# EAGLE board octanis_v0.4 (EAGLE 7.2.0)
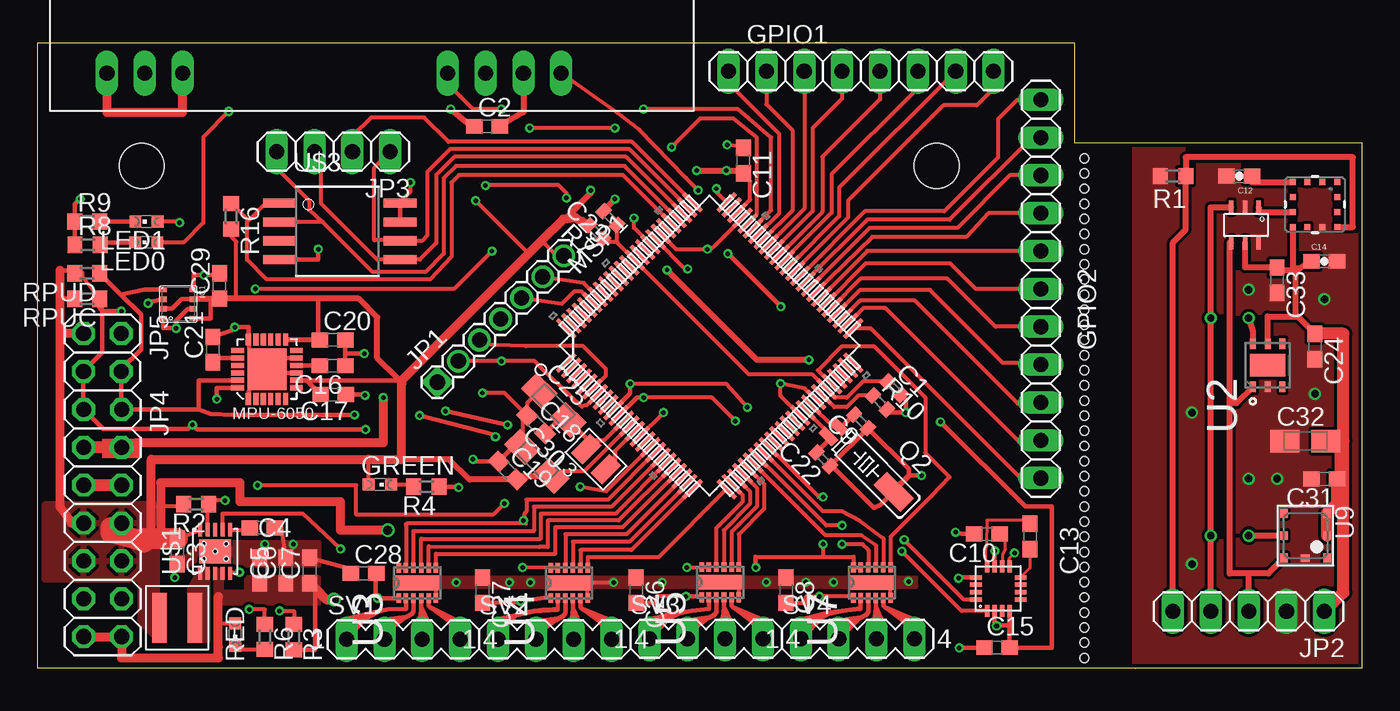
[diagram p0: board, top side]
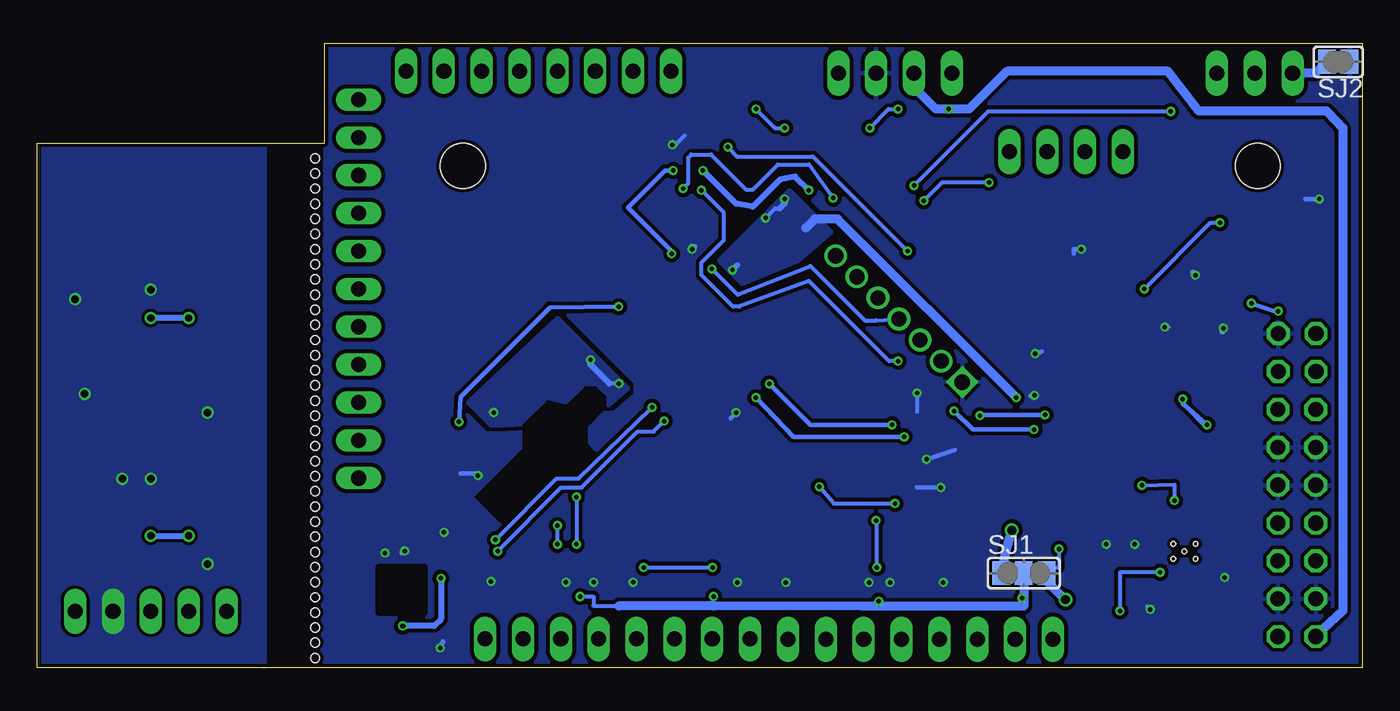
[diagram p1: board, bottom side, seen from below]

Size 88.9 x 41.94 mm. Coordinates in mm from the lower left corner, seen from the top.
Outline: 88.9,35.23 88.9,35.23
Outline: 88.9,35.23 73.67,35.23
Outline: 73.67,0 73.71,0
Outline: 73.71,35.23 69.62,35.23 69.62,41.94 0,41.94 0,0.03 88.9,0.03 88.9,35.23
Outline: 88.9,35.23 88.7,35.23
Copper layers (1*16): Top 0.035mm / dielectric 1.5mm / Bottom 0.035mm
Design rules "SeeedStudio_2layer_DRU_no_angle_20140221 *": minimum track width 8mil, minimum drill 12mil, track to track 8mil, track to pad 8mil, pad to pad 6mil, via to via 8mil, smd to smd 0mil, copper to edge 10mil, drill to drill 10mil, minimum pad ring 10mil, minimum via ring 6mil, stop-mask expansion 2mil, vias tented up to drill 100mil, thermal gap 10mil
Net classes: 0 default: width 0.305 mm; 1 power: width 0.203 mm, drill 0.305 mm, clearance 0.152 mm; 2 VIN: width 0.203 mm, drill 0.305 mm, clearance 0.152 mm; 3 fine: width 0.406 mm, drill 0.61 mm, clearance 0.152 mm
Holes 3 mm at 7.01,33.71 60.35,33.71
Holes 0.6 mm at 70.26,34.21 70.26,33.2 70.26,32.18 70.26,31.17 70.26,30.15 70.26,29.13 70.26,28.12 70.26,27.1 70.26,26.09 70.26,25.07 70.26,24.05 70.26,23.04 70.26,22.02 70.26,21.01 70.26,19.99 70.26,18.97 70.26,17.96 70.26,16.94 70.26,15.93 70.26,14.91 70.26,13.89 70.26,12.88 70.26,11.86 70.26,10.85 70.26,9.83 70.26,8.81 70.26,7.8 70.26,6.78 70.26,5.77 70.26,4.75 70.26,3.73 70.26,2.72 70.26,1.7 70.26,0.69
bRestrict: area 63,3.8 to 66,6.8

## Footprints (pad centres in the part's own frame; a part is rotated, then mirrored left to right if it is on the bottom)
C0402 = smd 0.7 x 0.9: 1 -0.65,0; 2 0.65,0
C0603 = smd 1.1 x 1: 1 -0.85,0; 2 0.85,0
0603-CAP = smd 1.1 x 1: 1 -0.85,0; 2 0.85,0
A/3216-18R = smd 1.95 x 1.5: + 1.375,0; - -1.375,0
LPCC16 = smd 0.8 x 0.3: 1 -1.5,0.75; 2 -1.5,0.25; 3 -1.5,-0.25; 4 -1.5,-0.75; 9 1.5,-0.75; 10 1.5,-0.25; 11 1.5,0.25; 12 1.5,0.75 | smd 0.3 x 0.8: 5 -0.75,-1.5; 6 -0.25,-1.5; 7 0.25,-1.5; 8 0.75,-1.5; 13 0.75,1.5; 14 0.25,1.5; 15 -0.25,1.5; 16 -0.75,1.5
1X08 = drill 1.016 long: 1 -8.89,0; 2 -6.35,0; 3 -3.81,0; 4 -1.27,0; 5 1.27,0; 6 3.81,0; 7 6.35,0; 8 8.89,0
1X11 = drill 1.016 long: 1 -12.7,0; 2 -10.16,0; 3 -7.62,0; 4 -5.08,0; 5 -2.54,0; 6 0,0; 7 2.54,0; 8 5.08,0; 9 7.62,0; 10 10.16,0; 11 12.7,0
CHIPLED_0603 = smd 0.8 x 0.8: A 0,-0.75; C 0,0.75
BME280 = smd 0.35 x 0.5: 1 0.975,-1.025; 2 0.325,-1.025; 3 -0.325,-1.025; 4 -0.975,-1.025; 5 -0.975,1.025; 6 -0.325,1.025; 7 0.325,1.025; 8 0.975,1.025
1:07X2MM = drill 1.016 pad 1.3 square: 1 0,0 | drill 1.016 pad 1.3: 2 4,0; 3 2,0; 4 6,0; 5 8,0; 6 10,0; 7 12,0
1X05 = drill 1.016 long: 1 -5.08,0; 2 -2.54,0; 3 0,0; 4 2.54,0; 5 5.08,0
1X04 = drill 1.016 long: 1 -3.81,0; 2 -1.27,0; 3 1.27,0; 4 3.81,0
2X07 = drill 1.016 octagon: 1 -7.62,-1.27; 2 -7.62,1.27; 3 -5.08,-1.27; 4 -5.08,1.27; 5 -2.54,-1.27; 6 -2.54,1.27; 7 0,-1.27; 8 0,1.27; 9 2.54,-1.27; 10 2.54,1.27; 11 5.08,-1.27; 12 5.08,1.27; 13 7.62,-1.27; 14 7.62,1.27
2X02 = drill 1.016 octagon: 1 -1.27,-1.27; 2 -1.27,1.27; 3 1.27,-1.27; 4 1.27,1.27
XFL4020 = smd 0.965 x 3.353: P$1 -1.181,0; P$2 1.181,0
0806 = smd 1.1 x 1.8: 1 -0.94,0; 2 0.94,0
QFN24 = smd 0.8 x 0.35: 1 -2,1.25; 2 -2,0.75; 3 -2,0.25; 4 -2,-0.25; 5 -2,-0.75; 6 -2,-1.25; 13 2,-1.25; 14 2,-0.75; 15 2,-0.25; 16 2,0.25; 17 2,0.75; 18 2,1.25 | smd 0.35 x 0.85: 7 -1.25,-1.975; 8 -0.75,-1.975; 9 -0.25,-1.975; 10 0.25,-1.975; 11 0.75,-1.975; 12 1.25,-1.975; 19 1.25,1.975; 20 0.75,1.975; 21 0.25,1.975; 22 -0.25,1.975; 23 -0.75,1.975; 24 -1.25,1.975 | smd 2.8 x 2.6: P 0,0
PZ100 = smd 1.676 x 0.279: 1 -7.62,5.994; 2 -7.62,5.512; 3 -7.62,5.004; 4 -7.62,4.496; 5 -7.62,3.988; 6 -7.62,3.505; 7 -7.62,2.997; 8 -7.62,2.489; 9 -7.62,2.007; 10 -7.62,1.499; 11 -7.62,0.991; 12 -7.62,0.508; 13 -7.62,0; 14 -7.62,-0.508; 15 -7.62,-0.991; 16 -7.62,-1.499; 17 -7.62,-2.007; 18 -7.62,-2.489; 19 -7.62,-2.997; 20 -7.62,-3.505; 21 -7.62,-3.988; 22 -7.62,-4.496; 23 -7.62,-5.004; 24 -7.62,-5.512; 25 -7.62,-5.994; 51 7.62,-5.994; 52 7.62,-5.512; 53 7.62,-5.004; 54 7.62,-4.496; 55 7.62,-3.988; 56 7.62,-3.505; 57 7.62,-2.997; 58 7.62,-2.489; 59 7.62,-2.007; 60 7.62,-1.499; 61 7.62,-0.991; 62 7.62,-0.508; 63 7.62,0; 64 7.62,0.508; 65 7.62,0.991; 66 7.62,1.499; 67 7.62,2.007; 68 7.62,2.489; 69 7.62,2.997; 70 7.62,3.505; 71 7.62,3.988; 72 7.62,4.496; 73 7.62,5.004; 74 7.62,5.512; 75 7.62,5.994 | smd 0.279 x 1.676: 26 -5.994,-7.62; 27 -5.512,-7.62; 28 -5.004,-7.62; 29 -4.496,-7.62; 30 -3.988,-7.62; 31 -3.505,-7.62; 32 -2.997,-7.62; 33 -2.489,-7.62; 34 -2.007,-7.62; 35 -1.499,-7.62; 36 -0.991,-7.62; 37 -0.508,-7.62; 38 0,-7.62; 39 0.508,-7.62; 40 0.991,-7.62; 41 1.499,-7.62; 42 2.007,-7.62; 43 2.489,-7.62; 44 2.997,-7.62; 45 3.505,-7.62; 46 3.988,-7.62; 47 4.496,-7.62; 48 5.004,-7.62; 49 5.512,-7.62; 50 5.994,-7.62; 76 5.994,7.62; 77 5.512,7.62; 78 5.004,7.62; 79 4.496,7.62; 80 3.988,7.62; 81 3.505,7.62; 82 2.997,7.62; 83 2.489,7.62; 84 2.007,7.62; 85 1.499,7.62; 86 0.991,7.62; 87 0.508,7.62; 88 0,7.62; 89 -0.508,7.62; 90 -0.991,7.62; 91 -1.499,7.62; 92 -2.007,7.62; 93 -2.489,7.62; 94 -2.997,7.62; 95 -3.505,7.62; 96 -3.988,7.62; 97 -4.496,7.62; 98 -5.004,7.62; 99 -5.512,7.62; 100 -5.994,7.62
MS3V-T1R = smd 0.635 x 1.27: P1 -0.47,-4.43; P2 0.47,-4.43 | smd 1.27 x 2.54: P3 0,1.3
R0603 = smd 1 x 1.1: 1 -0.85,0; 2 0.85,0
R0402 = smd 0.7 x 0.9: 1 -0.65,0; 2 0.65,0
SJ_2 = smd 1.168 x 1.6: 1 -1.524,0; 2 0,0; 3 1.524,0
SJ = smd 1.168 x 1.6: 1 -0.762,0; 2 0.762,0
MA04-1 = drill 1.016 long: 1 -3.81,0; 2 -1.27,0; 3 1.27,0; 4 3.81,0
ML8511 = smd 0.4 x 0.4: 1 -1.5,-1.5; 2 -1.5,-0.5; 3 -1.5,0.5; 4 -1.5,1.5; 5 -0.5,1.5; 6 0.5,1.5; 7 1.5,1.5; 8 1.5,0.5; 9 1.5,-0.5; 10 1.5,-1.5; 11 0.5,-1.5; 12 -0.5,-1.5
DFN300X300X110-7N = smd 0.711 x 0.406: 1 -1.448,0.991; 2 -1.448,0; 3 -1.448,-0.991; 4 1.448,-0.991; 5 1.448,0; 6 1.448,0.991 | smd 1.499 x 2.388: 7 0,0
SON50P200X300X80-13N = smd 0.66 x 0.305: 1 -1.016,1.245; 2 -1.016,0.762; 3 -1.016,0.254; 4 -1.016,-0.254; 5 -1.016,-0.762; 6 -1.016,-1.245; 7 1.016,-1.245; 8 1.016,-0.762; 9 1.016,-0.254; 10 1.016,0.254; 11 1.016,0.762; 12 1.016,1.245 | smd 0.991 x 3.099: 13 0,0
BMP180 = smd 0.6 x 0.5: 1 1.5,1.45; 2 0,1.45; 3 -1.5,1.45; 4 -1.5,-1.45; 5 0,-1.45; 6 1.5,-1.45 | smd 0.5 x 0.6: 7 1.5,0
S-PVSON-N10 = smd 0.28 x 0.825: 1 -1,-1.462; 2 -0.5,-1.462; 3 0,-1.462; 4 0.5,-1.462; 5 1,-1.462; 6 1,1.462; 7 0.5,1.462; 8 0,1.462; 9 -0.5,1.462; 10 -1,1.462 | smd 2.15 x 1.6: EXPAD 0,0 | hole 0.3: -0.75,0.5; 0.75,0.5; 0.75,-0.5; -0.75,-0.5; 0,0
STAR = smd 0.152 x 0.305: AGND 0.635,-0.635; DGND 0.635,0.635 | smd 0.305 x 0.152: GND 0.635,0
SOIC_8-LEAD = smd 0.61 x 2.21: CE -1.905,-2.934; RST/HOLD -0.635,5.156; SCK 0.635,5.156; SI 1.905,5.156; SO -0.635,-2.934; VDD -1.905,5.156; VSS 1.905,-2.934; WP 0.635,-2.934
HX1 = drill 1.016 long: 0V 13.97,0; EN 8.89,0; RFGND -13.97,0; RFGND2 -8.89,0; RFOUT -11.43,0; TXD 16.51,0; VCC 11.43,0
SOT-23-6 = smd 0.305 x 0.9: SCL 2.45,-0.45; SDA 2.45,1.95; VDD 1.5,1.95; VIN+ 0.6,-0.45; VIN- 0.6,1.95; VSS 1.5,-0.45

## Placement (x,y rotation side)
C1  100n  [C0402]  57.49,18.78 315 top
C2  100n  [C0603]  30.18,36.36 0 top
C3  22uF  [C0603]  9.39,7.83 270 top
C4  10nF  [C0603]  15.11,9.42 0 top
C5  22uF  [C0603]  14.93,6.56 90 top
C6  22uF  [C0603]  16.68,6.56 90 top
C7  3 x 22uF  [C0603]  18.28,6.56 90 top
C8  470n  [C0603]  50.24,5.23 270 top
C9  12p  [C0402]  55.27,16.56 135 top
C10  4.7u  [C0603]  63.72,9 180 top
C11  100n  [C0603]  47.37,34.06 270 top
C12  1nF  [0603-CAP]  80.64,33.02 180 top
C13  220n  [C0603]  66.61,8.85 270 top
C14  0.1uF  [0603-CAP]  86.36,27.3 0 top
C15  100n  [C0603]  64.4,1.38 0 top
C16  100n  [C0603]  19.81,20.29 180 top
C17  10n  [C0603]  19.86,18.36 180 top
C18  100n  [C0603]  33.48,16.36 315 top
C19  100n  [C0603]  31.55,13.26 315 top
C20  100n  [C0603]  19.81,22.02 0 top
C21  2.2n  [C0603]  11.79,21.37 90 top
C22  12p  [C0402]  52.73,14.02 135 top
C23  100n  [C0402]  38.44,30.21 135 top
C24  100n  [C0603]  85.72,21.59 270 top
C25  10u  [A/3216-18R]  34.65,17.63 315 top
C26  470n  [C0603]  40.18,5.23 270 top
C27  470n  [C0603]  29.87,5.23 270 top
C28  470n  [C0603]  21.89,6.35 0 top
C29  100n  [C0603]  12.23,25.65 90 top
C30  10u  [A/3216-18R]  33.53,13.87 315 top
C31  100n  [C0603]  86.36,12.7 180 top
C32  10u  [A/3216-18R]  85.09,15.24 0 top
C33  100n  [C0603]  83.19,26.04 270 top
COMPASS  HMC5883L  [LPCC16]  64.48,5.34 90 top
GPIO1  A7:A0  [1X08]  55.27,40.06 0 top
GPIO2  A18:A8  [1X11]  67.34,25.45 270 top
GREEN  3V-ok  [CHIPLED_0603]  22.99,12.32 270 top
IC1  BME280  [BME280]  9.46,24.43 270 top
JP1  [1:07X2MM]  26.84,19.19 45 top
JP2  [1X05]  81.28,3.81 180 top
JP3  SPI  [1X04]  19.87,34.66 180 top
JP4  [2X07]  4.39,9.73 270 top
JP5  [2X02]  4.37,21.18 270 top
L1  1uH  [XFL4020]  9.39,3.38 0 top
L3  4.7uH  [0806]  37.49,14.02 315 top
LED0  LED0  [CHIPLED_0603]  7.32,28.57 90 top
LED1  LED1  [CHIPLED_0603]  7.34,29.97 90 top
MPU-6050  MPU-6050  [QFN24]  15.42,20.07 90 top
MSP1  MSP432  [PZ100]  45.11,21.64 45 top
Q2  32.768kHz  [MS3V-T1R]  56.54,12.75 225 top
R1  10k  [R0603]  76.2,33.02 180 top
R2  1M  [R0603]  10.66,11 180 top
R3  1M  [R0603]  17.22,2.08 270 top
R4  1k  [R0603]  26.11,12.17 180 top
R6  1k  [R0603]  15.27,2.1 270 top
R7  0R  [R0402]  37.49,29.26 135 top
R8  1k  [R0603]  3.38,28.4 0 top
R9  1k  [R0603]  3.35,29.97 0 top
R10  91k 0.1% ±25 ppm/°C  [R0402]  56.54,17.83 315 top
R16  10k  [R0603]  13.01,30.31 270 top
RED  5V-ok  [CHIPLED_0603]  13.28,2.25 180 top
RPUC  10k  [R0603]  3.35,24.79 180 top
RPUD  10k  [R0603]  3.35,26.49 180 top
SJ1  3V3 V_Motor 5V  [SJ_2]  22.71,6.38 0 bottom
SJ2  [SJ]  1.61,40.69 180 bottom
SV1  [MA04-1]  24.56,1.93 0 top
SV2  [MA04-1]  34.72,1.93 0 top
SV3  [MA04-1]  44.88,1.96 0 top
SV4  [MA04-1]  55.04,1.96 0 top
U1  ML8511-UV-SENSOR  [ML8511]  85.72,31.12 180 top
U2  SHT21  [DFN300X300X110-7N]  82.55,20.32 90 top
U3  DRV8836DSSR  [SON50P200X300X80-13N]  25.5,5.71 90 top
U4  DRV8836DSSR  [SON50P200X300X80-13N]  35.69,5.71 90 top
U5  DRV8836DSSR  [SON50P200X300X80-13N]  45.82,5.77 90 top
U7  DRV8836DSSR  [SON50P200X300X80-13N]  56.01,5.74 90 top
U9  BMP180  [BMP180]  85.09,8.89 270 top
U$1  TPS61232  [S-PVSON-N10]  11.93,7.83 0 top
U$2  STARGND  [STAR]  5.64,14.1 90 top
U$3  SST25VF064C  [SOIC_8-LEAD]  19.18,29.31 270 top
U$4  HX1  [HX1]  18.64,39.92 0 top
U$5  MCP3425  [SOT-23-6]  82.55,30.48 180 top

## Library data of the parts
C1-C11 C13 C15-C31 C33 R2-R4 R6-R10 R16 RPUC RPUD = rcl
C12 = SparkFun-Capacitors; PROD_ID: CAP-07886
C14 = SparkFun-Capacitors; PROD_ID: CAP-00810
C32 R1 = resistor
COMPASS = HMC5883L
GPIO1 GPIO2 JP3-JP5 = pinhead
GREEN LED0 LED1 RED = adafruit
IC1 = bosch-bme280
JP1 JP2 = Headerlibrary
L1 = Coilcraft; URL: http://www.coilcraft.com/xfl4020.cfm
L3 = Murata
MPU-6050 = seb
MSP1 = MSP-EXP432
Q2 = microcrystal
SJ1 SJ2 = jumper
SV1-SV4 = con-lstb; OC_FARNELL: unknown; OC_NEWARK: unknown
U1 = ML8511
U2 = SENSIRION-SHT21; MPN: SHT21; OC_FARNELL: 1855468; OC_NEWARK: 20T1172; PACKAGE: DFN-6; SUPPLIER: SENSIRION
U3-U5 U7 = DRV8834; MPN: DRV8836DSSR; OC_FARNELL: 2115236; OC_NEWARK: 94T6066; PACKAGE: SON-12; SUPPLIER: TEXAS INSTRUMENTS
U9 = SparkFun-Sensors
U$1 = texasinstruments
U$2 = lpatiny
U$3 = BertaLib
U$4 = Octanis1
U$5 = phMeter

## Nets
3.3V [power]: U$3.WP
5VEN: MSP1.17 R2.1 U$1.9
+3V1 [power]: C14.1 C24.1 C31.1 C32.+ C33.1 JP2.1 U1.7 U2.5 U9.2 U9.3 U$5.VDD
+3V3 [power]: C3.1 C11.2 C15.2 C17.2 C19.2 C20.1 C29.1 C30.+ COMPASS.2 COMPASS.4 COMPASS.13 GREEN.A IC1.2 IC1.6 IC1.8 JP1.7 JP4.7 JP4.8 JP4.9 JP4.10 JP5.1 L1.P$1 MPU-6050.8 MPU-6050.13 MSP1.13 MSP1.73 R2.2 R7.2 R16.2 RPUC.2 RPUD.2 SJ1.1 U$1.10 U$3.RST/HOLD U$3.VDD
+5V [fine]: C2.1 C5.1 C6.1 C7.1 JP4.13 JP4.14 R3.2 RED.A SJ1.3 U$1.3 U$1.4 U$1.7 U$4.VCC
A14: GPIO2.7 MSP1.55
A15: GPIO2.8 MSP1.54
A16: GPIO2.9 MSP1.53
A17: GPIO2.10 MSP1.52
A18: GPIO2.11 MSP1.51
A19: MSP1.50
A20: MSP1.49
A21: MSP1.48
A22: MSP1.47
AGND [power]: C1.2 C23.2 MSP1.40 MSP1.43 MSP1.84 R10.2 U$2.AGND
AVCC1 [VIN]: C1.1 C23.1 MSP1.45 MSP1.87 R7.1
GND [power]: C2.2 C3.2 C4.2 C5.2 C6.2 C7.2 C8.1 C9.1 C10.2 C11.1 C15.1 C16.1 C17.1 C18.1 C19.1 C20.2 C21.2 C22.1 C25.- C26.1 C27.1 C28.1 C29.2 C30.- COMPASS.9 COMPASS.11 IC1.1 IC1.5 IC1.7 JP1.1 JP4.3 JP4.4 JP4.5 JP4.6 JP4.11 JP4.12 JP5.2 MPU-6050.1 MPU-6050.9 MPU-6050.11 MPU-6050.18 MPU-6050.P MSP1.15 MSP1.72 MSP1.82 Q2.P3 R4.1 R6.1 R8.1 R9.1 SJ2.1 U3.6 U3.13 U4.6 U4.13 U5.6 U5.13 U7.6 U7.13 U$1.EXPAD U$2.DGND U$2.GND U$3.VSS U$4.0V
GND1: C12.2 C14.2 C24.2 C31.2 C32.- C33.2 JP2.2 R1.2 U1.5 U2.2 U9.7 U$5.VIN- U$5.VSS
HX1_EN: MSP1.70 U$4.EN
IND: L1.P$2 U$1.1 U$1.2
LED0: LED0.A MSP1.75
LED1: LED1.A MSP1.71
M1IN1: MSP1.19 U3.10
M1IN2: MSP1.20 U3.9
M2IN1: MSP1.21 U3.8
M2IN2: MSP1.22 U3.7
M3IN1: MSP1.23 U4.10
M3IN2: MSP1.24 U4.9
M4IN1: MSP1.25 U4.8
M4IN2: MSP1.26 U4.7
M5IN1: MSP1.27 U5.10
M5IN2: MSP1.28 U5.9
M6IN1: MSP1.29 U5.8
M6IN2: MSP1.30 U5.7
M7IN1: MSP1.32 U7.10
M7IN2: MSP1.31 U7.9
M8IN1: MSP1.33 U7.8
M8IN2: MSP1.46 U7.7
M1234SLEEP: MSP1.18 U3.11 U3.12 U4.11 U4.12
M5678SLEEP: MSP1.34 U5.11 U5.12 U7.11 U7.12
N$1: C18.2 C25.+ L3.1 MSP1.12
N$2: R3.1 U$1.5
N$4: GREEN.C R4.2
N$5: LED0.C R8.2
N$6: LED1.C R9.2
N$8: C22.2 MSP1.41 Q2.P2
N$10: C9.2 MSP1.42 Q2.P1
N$13: SV2.1 U4.2
N$14: GPIO2.1 MSP1.61
N$15: GPIO2.2 MSP1.60
N$17: C10.1 COMPASS.10
N$18: C16.2 MPU-6050.10
N$19: C21.1 MPU-6050.20
N$20: GPIO2.3 MSP1.59
N$21: GPIO2.4 MSP1.58
N$22: GPIO2.5 MSP1.57
N$23: GPIO2.6 MSP1.56
N$24: C12.1 U1.10
N$25: C13.2 COMPASS.8
N$26: U1.8 U$5.VIN+
N$27: GPIO1.1 MSP1.69
N$28: GPIO1.2 MSP1.68
N$30: GPIO1.3 MSP1.67
N$32: C13.1 COMPASS.12
N$33: MSP1.44 R10.1
N$34: L3.2 MSP1.14
N$35: GPIO1.4 MSP1.66
N$36: GPIO1.5 MSP1.65
N$37: GPIO1.6 MSP1.64
N$38: GPIO1.8 MSP1.62
N$39: SV2.2 U4.3
N$40: SV2.3 U4.4
N$41: SV2.4 U4.5
N$42: C4.1 U$1.6
N$43: GPIO1.7 MSP1.63
N$44: R6.2 RED.C
N$45: SV3.1 U5.2
N$46: SV3.2 U5.3
N$47: SV3.3 U5.4
N$48: SV3.4 U5.5
N$49: SV1.1 U3.2
N$50: SV1.2 U3.3
N$51: SV1.3 U3.4
N$52: SV1.4 U3.5
N$53: SV4.1 U7.2
N$54: SV4.2 U7.3
N$55: SV4.3 U7.4
N$56: SV4.4 U7.5
N$75: JP1.4 MSP1.83
N$76: JP1.6 MSP1.94
N$77: JP1.5 MSP1.95
P1.0/UCA0STE: MSP1.4
P1.1/UCA0CLK: MSP1.5
P1.4/UCB0STE: MSP1.8
P1.5/UCB0CLK: MSP1.9
P2.0/PM_UCA1STE: MSP1.16
P3.3/PM_UCA2TXD/PM_UCA2SIMO: MSP1.35
P3.4/PM_UCB2STE: MSP1.36
P3.5/PM_UCB2CLK: MSP1.37
P3.6/PM_UCB2SIMO/PM_UCB2SDA: MSP1.38
P3.7/PM_UCB2SOMI/PM_UCB2SCL: MSP1.39
P6.7/TA2.4/UCB3SOMI/UCB3SCL/C1.0: MSP1.81
P7.0/PM_SMCLK/PM_DMAE0: MSP1.88
P7.1/PM_C0OUT/PM_TA0CLK: MSP1.89
P7.2/PM_C1OUT/PM_TA1CLK: MSP1.90
P7.3/PM_TA0.0: MSP1.91
P9.2/TA3.3: MSP1.74
P9.4/UCA3STE: MSP1.96
P9.5/UCA3CLK: MSP1.97
P9.6/UCA3RXD/UCA3SOMI: MSP1.98
P9.7/UCA3TXD/UCA3SIMO: MSP1.99
P10.0/UCB3STE: MSP1.100
P10.1/UCB3CLK: MSP1.1
P10.2/UCB3SIMO/UCB3SDA: MSP1.2
P10.3UCB3SOMI/UCB3SCL: MSP1.3
PJ.2/HFXOUT: MSP1.85
PJ.3/HFXIN: MSP1.86
PJ.4/TDI/ADC14CLK: MSP1.92
PJ.5/TDO/SWO: MSP1.93
RFGND [power]: SJ2.2 U$4.RFGND U$4.RFGND2
RX: JP1.2 MSP1.6
SCL: COMPASS.1 IC1.4 JP4.2 JP5.4 MPU-6050.23 MSP1.11 RPUD.1
SCL1: JP2.4 U2.6 U9.5 U$5.SCL
SDA: COMPASS.16 IC1.3 JP4.1 JP5.3 MPU-6050.24 MSP1.10 RPUC.1
SDA1: JP2.3 U2.1 U9.6 U$5.SDA
SPI_EXTSLAVE_TE: JP3.2 MSP1.76
SPI_FLASH_CS: MSP1.80 R16.1 U$3.CE
SPI_MISO: JP3.4 MSP1.79 U$3.SO
SPI_MOSI: JP3.3 MSP1.78 U$3.SI
SPI_SCK: JP3.1 MSP1.77 U$3.SCK
TX: JP1.3 MSP1.7 U$4.TXD
UV_EN: JP2.5 R1.1 U1.4
V_MOTOR [fine]: C8.2 C26.2 C27.2 C28.2 SJ1.2 U3.1 U4.1 U5.1 U7.1

## Tracks (layer width: path | path; a pad name or v marks a point on that pad's centre or on a via)
5VEN  (via drill 0.3)
  Top 0.254: U$1.9 11.43,11 R2.1 11.51,11.25 v12.6,11.25 | 14.88,12.32 v14.78,12.27 21.4,12.27 21.4,10.29 30.58,10.29 v31.34,11.05 | MSP1.17 38.17,11.86 v36.42,12.17
  Bottom 0.254: v14.78,12.27 12.6,12.32 v12.6,11.25 | v36.42,12.17 35.46,11.05 v31.34,11.05
+3V1
  Top 0.406: C32.+ 87.21,14.49 C31.1 | U$5.VDD 81.05,26.88 C33.1 83.19,26.67 84.46,26.67 | C14.1 84.74,26.84 | 84.74,26.84 84.46,26.67 | U1.7 84.23,26.84 84.74,26.84 | C24.1 84.56,23.6 | 84.56,23.6 84.46,23.71 84.46,26.67 | U2.5 82.55,23.6 84.56,23.6
  Top 0.61: 86.36,15.24 87.63,15.24
  Top 0.813: JP2.1 87.63,5.08 87.63,15.24 | 87.63,15.24 C32.+ 86.36,15.24 | U9.2 U9.3 87.21,11.06 C31.1 | 87.63,15.24 87.63,22.44 C24.1
+3V3  (via drill 0.3, 0.6)
  Top 0.254: C3.1 U$1.10 | R2.2 9.81,10.85 8.28,10.85 | GREEN.A 22.24,13.98 22.2,14.02 | MSP1.13 36.68,13.21 34.81,13.21 arc90 C30.+ | U$3.RST/HOLD 24.33,31.27 25.04,31.98 v25.04,32.59 | v29.41,31.37 | v29.41,31.37 32.96,27.82 | JP1.7 34.83,27.67 33.83,28.68 | R7.2 36.6,30.15 35.41,30.15 | MSP1.73 47.83,31.43 47.83,32.65 C11.2 | 32.39,12.9 arc90 C19.2 | 13.22,24.81 13.36,24.95 13.36,28.63 13.01,28.97 R16.2
  Top 0.305: U$3.RST/HOLD U$3.VDD | C20.1 16.71,22.02 MPU-6050.13 18.85,22.07 18.85,24.8 16.2,24.8 16.2,24.81 13.22,24.81 | C17.2 18.06,19.32 MPU-6050.8 | MPU-6050.8 17.41,19.33 | COMPASS.4 65.23,2.88 | 65.23,2.88 65.23,1.4 C15.2 68.07,1.38 68.07,10.85 66.29,10.85 v60.6,16.54 | COMPASS.2 64.23,3 v64.4,2.83 | v61.81,6.03 61.81,6.09 COMPASS.13 | v64.35,2.83 64.35,2.88 65.23,2.88 | 2.49,26.49 RPUD.2 2.3,26.7 1.52,26.7 | RPUC.2 2.5,24.55 2.11,24.79 1.52,24.79 | IC1.6 9.68,24.76 9.06,24.13 8.46,24.13 IC1.2 | IC1.8 11.65,23.46 11.65,24.76 | 24.21,19.43 24.46,19.18 | MPU-6050.8 24.46,19.32 24.46,19.08 | v49.89,24.26 v46.33,27.81
  Top 0.406: C20.1 19.05,22.11 | IC1.6 11.65,24.76 11.98,24.76 C29.1 18.85,24.8 21.55,24.8 22.81,23.55 22.81,20.83 24.21,19.43 24.21,19.41 24.28,19.33 | 35.41,30.15 37.13,31.88 v37.13,32.08 | v44.25,33.4 v46.23,33.4 47.38,33.4 C11.2 | C19.2 29.01,12.66 27.65,14.02 24.46,14.02 | 32.39,12.9 C30.+
  Top 0.61: v23.52,9.26 20.35,9.26 20.35,11.16 13.6,11.16 13.6,12.43 8.28,12.43 8.28,10.85 8.28,8.68 7.65,8.68 | 7.01,8.94 7.65,8.94 7.65,14.02 22.2,14.02 24.46,14.02 24.46,19.08 24.46,19.18 24.46,19.3 32.96,27.82 33.83,28.68 35.31,30.15 36.09,30.25 R7.2 | 1.52,21.72 1.52,10.82 2.31,9.73 JP4.7 | 1.52,26.7 1.52,24.79 1.52,21.72 | JP5.1 1.63,22.45 1.52,21.72
  Top 1.422: C3.1 7.65,8.68 7.17,8.68 7.17,8.46 4.95,9.1 4.95,9.42
  Bottom 0.254: v25.04,32.59 28.19,32.59 v29.41,31.37
  Bottom 0.305: v64.4,2.83 v64.35,2.83 | v60.6,16.54 60.5,18.21 54.51,24.21 v49.89,24.26 | v46.33,27.81 46.23,27.91 46.28,27.91 49.28,30.91 46.79,33.4 v46.23,33.4
  Bottom 0.406: v61.81,6.03 61.81,3.28 62.27,2.83 v64.4,2.83 | v37.13,32.08 38.05,32.99 39.07,32.79 40.89,30.96 42.01,31.17 v44.25,33.4
  Bottom 0.61: SJ1.1 23.77,8.31 v23.52,9.26
  pour Top: 0.5,11 8.12,11 6.85,5.92 0.5,5.92
  pour Top (no thermals): 8.12,1.8 8.12,9.1 6.85,9.73 6.85,3.07
+5V  (via drill 0.3, 0.6)
  Top 0.254: U$1.7 12.43,10.38 17.81,10.38 v20.35,7.99 | 12.15,1.42 12.2,3 RED.A
  Top 0.305: R3.2 18.64,1.23 18.64,5.35
  Top 0.406: v27.74,37.52 29.09,36.4 C2.1
  Top 0.61: JP4.13 JP4.14 5.66,0.69 12.15,0.69 12.15,1.42 12.15,4.81 | C7.1 18.64,5.35 19.39,4.6 v19.91,4.6
  Bottom 0.254: v20.35,7.99 20.35,6.72 20.73,6.72 SJ1.3
  Bottom 0.406: 28.6,37.52 28.6,37.46 v27.74,37.52
  Bottom 0.61: JP4.13 arc90 2.64,2.59 1.3,3.86 1.3,36.25 2.39,37.39 10.96,37.39 13.04,40.06 23.84,40.06 26.38,37.52 28.6,37.52 30.07,38.99 U$4.VCC | v19.91,4.6 21.18,5.87 SJ1.3
  pour Top (no thermals): 18.92,6.08 14,6.08 14,5.13 12.41,5.13 12.41,6.56 11.93,6.56 11.93,4.34 18.92,4.34
A14
  Top 0.254: GPIO2.7 64.29,22.91 61.06,26.14 55.25,26.14 MSP1.55
A15
  Top 0.254: MSP1.54 55.2,25.37 59.89,25.37 64.77,20.5 67.21,20.5 GPIO2.8
A16
  Top 0.254: GPIO2.9 65.86,17.83 65.79,17.75 58.88,24.66 55.21,24.66 MSP1.53
A17
  Top 0.254: GPIO2.10 67.21,15.16 65.89,15.16 56.9,24.16 55.42,24.16 MSP1.52
A18
  Top 0.254: GPIO2.11 65.96,12.75 55.92,22.79 MSP1.51
AGND  (via drill 0.3)
  Top 0.254: MSP1.40 49.87,18.28 v49.87,19.1 51.49,18.78 MSP1.43 | MSP1.84 40.03,29.56 v40.03,30.21
  Top 0.305: R10.2 57.23,17.14 v58.27,17.14 58.27,18.01 C1.2
  Top 0.406: v51.78,20.69 48.29,20.69 v42.25,26.72 | C23.2 37.98,30.71 v38.76,31.48
  Top 0.61: v23.22,18.16 23.22,15.11 6.65,15.11 arc90 U$2.AGND
  Bottom 0.254: v49.87,19.1 50.51,19.1 | v40.03,30.21 39.4,30.85 39.08,30.85
  Bottom 0.305: v58.27,17.14 58.47,17.14
  Bottom 0.406: 50.51,19.1 51.78,20.37 v51.78,20.69 | v42.25,26.72 41.94,27.04 | v38.76,31.48 38.76,31.17 39.08,30.85
  Bottom 0.61: v23.22,18.16 35.2,30.15 36.73,30.15 37.34,29.54
  pour Bottom: 54,23.55 60.03,17.83 58.45,16.24 51.78,16.56 49.24,18.78
  pour Bottom: 38.44,32.12 43.21,27.36 41.62,25.77 37.81,27.36 35.59,29.26
AVCC1
  Top 0.254: C1.1 55.41,19.24 54.32,18.15 53.56,18.15 MSP1.45 51.97,19.74 47.73,19.74 MSP1.87 38.9,28.57 38.9,28.63 | 38.9,28.63 C23.1 | R7.1 38.13,28.63 38.9,28.63
GND  (via drill 0.3)
  Top 0.203: 57.28,4.77 U7.6 | 26.72,5.66 25.5,5.66 U3.13 | 46.99,5.69 45.92,5.69 U5.13 | 56.06,5.69 U7.13 | COMPASS.9 65.23,7.39 v65.57,7.73
  Top 0.254: v38.67,5.74 37.08,5.74 arc90 36.93,5.59 U4.6 | U5.6 47.07,5.61 arc90 46.99,5.69 | U7.6 57.25,5.75 arc-90 57.26,5.77 56.03,5.77 arc90 U7.13 | U3.6 26.75,5.64 arc90 26.72,5.66 | C4.2 16.38,9.42 C6.2 | v9.23,6.08 9.23,7.04 | R6.1 15.27,3.94 v14.22,3.94 | 14.17,18.56 14.43,18.82 | MPU-6050.18 14.22,21.46 14.53,21.26 | MSP1.82 42.87,28.12 v44.96,28.12 | MSP1.72 45.43,28.32 45.06,28.02 v44.96,28.12 | 44.86,28.22 v44.96,28.12 | C11.1 47.36,34.96 v46.28,35.13 | MSP1.15 v42.01,17.14 | C18.1 31.37,18.47 v29.87,18.47 | C25.- 32.88,17.8 C18.1 | C18.1 32.56,16.64 C30.-
  Top 0.305: C28.1 20.62,6.77 C7.2 | COMPASS.11 64.23,7.78 v64.25,7.85 | 65.58,7.74 v65.57,7.73 | MPU-6050.18 14.17,22.89 v13.26,22.89 13.21,22.73 C21.2 | C10.2 62.03,9.02 v61.61,9.12 | MPU-6050.1 14.17,18.56 | 14.43,18.82 14.43,19.08 MPU-6050.P 15.88,20.07 15.9,20.04 | MPU-6050.9 15.92,19.82 15.9,19.84 15.9,20.04 | 15.9,20.04 15.9,20.75 | 15.9,20.75 15.9,20.82 MPU-6050.11 | 14.53,21.26 15.39,21.26 15.9,20.75 | C20.2 C16.1 20.66,21.09 20.68,21.11 v21.95,21.11 | C17.1 21.95,18.36 v22,18.31 | C15.1 63.6,1.35 v61.86,1.35 | IC1.5 10.49,26.36 v11.19,26.36 12.28,26.36 C29.2 | IC1.1 8.44,22.81 v9.31,22.81 9.31,23.32 10.1,24.11 IC1.7 | U$3.VSS 18.85,27.41 v18.85,28.12 | C22.1 C9.1 58.47,13.36 58.47,12.98 57.46,11.97 Q2.P3 | Q2.P3 56.58,10.95 56.13,10.74 53.39,13.49 53.29,13.69 | Q2.P3 58.56,12.93 v59.33,12.93 | C30.- 31.93,14.84 C19.1 29.4,13.86 v29.24,14.02 | R4.1 28.23,12.17 v28.28,12.12 | R9.1 2.5,28.42 R8.1 2.53,31.13 v2.88,31.48
  Top 0.406: U$4.0V 32.61,37.31 C2.2
  Top 0.61: JP4.4 arc90 5.64,14.8 U$2.GND U$2.DGND
  Top 0.813: JP4.4 JP4.3 | JP4.6 JP4.5
  Bottom 0.254: v14.22,3.94 14.38,4.14 14.43,4.14 | v44.96,28.12 44.75,28.32 45.06,28.32 | v46.28,35.13 46.08,35.13 45.47,35.74 | v42.01,17.14 42.37,16.79 42.37,16.74 | v29.87,18.47 29.87,17.2
  Bottom 0.305: v64.25,7.85 64.1,7.75 64.45,7.7 | v13.26,22.89 13,22.89 | v21.95,21.11 21.49,21.26 | v22,18.31 22.2,18.31 22.25,18.26 | v61.86,1.35 61.76,1.56 61.66,1.81 | v11.19,26.36 11.34,26.57 11.39,26.57 | v9.31,22.81 9.31,22.55 9.41,22.55 | v18.85,28.12 19.35,28.12 19.35,27.81 | v59.33,12.93 59.49,13.08 60.5,13.08 | v29.24,14.02 27.33,14.66 | v28.28,12.12 29.87,12.12 | v2.88,31.48 3.84,31.48
  other vias: 28.11,5.74 33.08,5.74 31.69,5.74 41.92,5.74 48.92,5.77 53.43,5.77 51.57,5.77 15.27,8.31 17.17,8.31 58.46,5.82
  pour Bottom (isolate 0.254, rank 2): -0.71,42.04 69.51,41.96 69.77,-0.43 0.03,-0.43
  pour Top (no thermals): 9.07,7.51 10.03,7.51 10.98,8.46 18.92,8.46 18.92,6.88 13.84,6.88 12.88,7.19 10.66,7.19 9.71,6.56 9.07,6.56
  pour Top (no thermals): 23.98,5.42 58.94,5.45 58.97,6.08 23.98,6.06
GND1  (via drill 0.5)
  other vias: 81.28,25.4 86.36,24.77 85.72,18.41 83.19,12.7 81.28,12.7 77.47,6.98 77.47,17.14
  pour Top (no thermals): 73.66,0 73.66,35.56 88.9,35.56 88.9,0
  pour Bottom (no thermals): 73.66,0 73.66,35.56 88.9,35.56 88.9,0
HX1_EN  (via drill 0.3)
  Top 0.254: MSP1.70 49.24,30.73 49.24,35.61 47.02,37.52 v40.67,37.52 | v38.76,36.25 v33.05,36.25 | v31.14,37.52 29.24,37.52 27.53,39.22 U$4.EN
  Bottom 0.254: v40.67,37.52 39.4,36.25 v38.76,36.25 | v33.05,36.25 31.78,37.52 v31.14,37.52
IND
  pour Top (no thermals): 11.46,6.56 11.46,1.8 10.19,1.8 10.19,5.29 10.82,6.56
LED0  (via drill 0.3)
  Top 0.254: MSP1.75 45.57,31.96 v45.57,32.18 | v30.07,32.38 30.12,32.44 34.95,32.44 35.51,31.88 v35.51,31.55 | v12.85,37.36 11.14,35.65 11.14,29.9 9.82,28.57 LED0.A
  Bottom 0.254: v45.57,32.18 45.21,32.54 45.21,34.26 45.01,34.47 43.69,34.47 41.35,32.13 40.89,32.13 39.22,33.81 37.13,33.81 v35.51,31.55 | v30.07,32.38 25.1,37.36 v12.85,37.36
LED1  (via drill 0.3)
  Top 0.254: MSP1.71 48.29,30.46 48.29,35.61 46.7,36.88 44.48,36.88 v42.57,34.98 | v30.51,27.99 27.97,25.45 v14.63,25.45 | v9.55,29.9 9.47,29.97 LED1.A
  Bottom 0.254: v42.57,34.98 41.94,34.34 36.86,34.34 v30.51,27.99 | v14.63,25.45 10.19,29.9 v9.55,29.9
M1IN1
  Top 0.254: U3.10 25.25,9.19 33.32,9.19 33.32,10.82 38.53,10.82 MSP1.19
M1IN2
  Top 0.254: U3.9 25.76,8.69 33.78,8.69 33.78,10.36 38.79,10.36 MSP1.20
M2IN1
  Top 0.254: U3.8 26.26,8.18 33.68,8.13 34.24,8.13 34.24,9.91 39.02,9.91 MSP1.21
M2IN2
  Top 0.254: U3.7 26.75,7.67 34.75,7.67 34.75,9.45 39.28,9.45 MSP1.22
M3IN1
  Top 0.254: U4.10 arc90 35.43,6.78 35.43,8.99 39.54,8.99 MSP1.23
M3IN2
  Top 0.254: U4.9 35.94,8.48 39.75,8.48 MSP1.24
M4IN1
  Top 0.254: U4.8 36.45,7.92 39.87,7.92 MSP1.25
M4IN2
  Top 0.254: U4.7 36.96,6.73 36.93,7.44 41.69,7.44 MSP1.26
M5IN1
  Top 0.254: U5.10 45.57,9.4 47.33,11.16 47.33,11.62 MSP1.27
M5IN2
  Top 0.254: MSP1.28 47.81,11.87 47.81,11 46.06,9.26 46.06,6.79 U5.9
M6IN1
  Top 0.254: MSP1.29 48.29,12.11 48.29,10.85 46.58,9.14 U5.8
M6IN2
  Top 0.254: 47.09,6.78 U5.7 47.07,8.99 48.76,10.69 48.76,12.35 MSP1.30
M7IN1  (via drill 0.3)
  Top 0.254: U7.10 55.75,7.92 55.37,8.31 v54,8.31 | v54,9.58 52.94,9.58 MSP1.32
  Bottom 0.254: v54,8.31 v54,9.58
M7IN2
  Top 0.254: MSP1.31 52.85,8.94 55.27,8.94 56.26,8.27 U7.9
M8IN1
  Top 0.254: MSP1.33 52.7,10.53 54,10.53 55.18,9.89 56.77,8.71 U7.8
M8IN2
  Top 0.254: MSP1.46 53.29,19.07 52.37,19.99 54,21.62 56.13,21.62 59.59,18.16 59.59,14.45 61.21,12.83 59.99,11.56 57.25,8.81 U7.7
M1234SLEEP  (via drill 0.3)
  Top 0.254: U3.12 U3.11 24.74,9.6 arc-90 24.82,9.7 32.77,9.7 v32.61,9.91 32.72,10.41 32.82,10.52 32.82,11.3 38.29,11.3 MSP1.18 | U4.12 v32.56,6.76
  Top 0.305: U4.11 U4.12
  Bottom 0.254: v32.56,6.76 32.56,9.75 arc-90 v32.61,9.91
M5678SLEEP  (via drill 0.3)
  Top 0.254: 48.16,7.47 48.16,6.76 v48.21,6.76 48.21,7.47 52.73,7.47 | U5.11 U5.12 44.07,6.76 v43.59,6.76 | 52.73,7.47 54.76,7.47 U7.12 U7.11 | MSP1.34 52.43,11.48 v52.73,11.48 | v52.73,8.31 52.73,7.47
  Bottom 0.254: v48.21,6.76 v43.59,6.76 | v52.73,11.48 v52.73,8.31
N$1
  Top 0.254: MSP1.12 38.04,15.29
  Top 0.305: 38.04,15.29 37.49,15.29 | 37.49,15.29 36.89,14.69 L3.1 | 37.49,15.29 36.98,15.29 C25.+ 34.98,16.66 C18.2
N$2  (via drill 0.3)
  Top 0.254: U$1.5 12.99,6.43 v13.56,6.43 | v16.26,3.84 17.22,3.84 R3.1
  Bottom 0.254: v13.56,6.43 16.26,6.43 v16.26,3.84
N$4
  Top 0.254: GREEN.C 25.11,12.32 R4.2
N$5
  Top 0.254: 4.41,28.57 R8.2
  Top 0.305: 4.41,28.57 LED0.C
N$6
  Top 0.305: LED1.C R9.2
N$7
  cutout Bottom: 51.46,14.34 52.1,14.97 52.1,16.24 50.83,17.51 50.83,18.15 51.46,18.78 52.1,18.78 53.37,17.51 54.64,17.83 56.22,16.24 56.22,14.66 59.4,11.48 57.81,9.89 54.32,13.39 53.05,13.07
N$8
  Top 0.254: MSP1.41 53.08,15.79 Q2.P2
  Top 0.305: C22.2 53.08,15.28 Q2.P2
N$10
  Top 0.254: MSP1.42 53.37,16.22 Q2.P1
  Top 0.305: C9.2 54.01,16.22 Q2.P1
N$13
  Top 0.254: U4.2 34.93,3.94 34.54,3.94 arc23 31.55,3.33 arc85 SV2.1
N$14
  Top 0.254: GPIO2.1 65.76,38.15 64.47,36.86 64.47,34.26 60.86,30.66 55.53,30.66 MSP1.61
N$15
  Top 0.254: GPIO2.2 66.73,35.61 61.21,30.1 55.69,30.1 MSP1.60
N$16
  Top 0.305: 34.9,3.91 33.35,3.81 | 33.35,3.81 32.11,3.56 30.56,1.8 | 33.35,3.81 30.73,3.25 32.05,3.56 30.78,2.49 31.65,3.15 30.84,2.34
N$17
  Top 0.203: COMPASS.10 64.78,6.89 64.78,7.6 64.96,7.98 64.96,9 C10.1
N$18
  Top 0.305: C16.2 18.94,20.32 MPU-6050.10
N$19
  Top 0.305: MPU-6050.20 11.81,20.82 C21.1
N$20
  Top 0.254: GPIO2.3 65.25,33.07 61.72,29.54 55.85,29.54 MSP1.59
N$21
  Top 0.254: GPIO2.4 63.83,30.53 62.33,28.93 56.02,28.93 MSP1.58
N$22
  Top 0.254: GPIO2.5 55.7,27.99 MSP1.57
N$23
  Top 0.254: GPIO2.6 62.97,25.45 61.26,27.15 55.58,27.15 MSP1.56
N$24
  Top 0.406: C12.1 81.5,32.61 U1.10
N$25
  Top 0.203: C13.2 66.61,6.72 COMPASS.8
N$26
  Top 0.406: U$5.VIN+ 81.95,30.61 U1.8
N$27
  Top 0.254: MSP1.69 49.78,30.55 49.78,35.85 46.38,39.26 | 46.38,38.73 46.38,39.26 | 46.38,39.26 GPIO1.1
N$28
  Top 0.254: GPIO1.2 48.92,37.85 50.66,36.11 50.66,30.71 MSP1.68
N$30
  Top 0.254: GPIO1.3 51.46,30.83 MSP1.67
N$32
  Top 0.203: C13.1 arc90 66.37,9.94 63.7,9.94 63.69,8.18 63.61,8.01 63.61,7.37 COMPASS.12
N$33
  Top 0.254: R10.1 55.1,18.29 54.32,17.51 53.48,17.51 MSP1.44
N$34
  Top 0.254: MSP1.14 38.76,14.57
  Top 0.305: 38.76,14.57 38.76,14.02 38.16,13.42 L3.2
N$35
  Top 0.254: GPIO1.4 54,38.23 52.02,36.25 52.02,30.67 MSP1.66
N$36
  Top 0.254: GPIO1.5 56.54,38.18 52.68,34.32 52.68,30.61 MSP1.65
N$37
  Top 0.254: GPIO1.6 58.78,39.75 58.78,38.63 53.29,33.15 53.29,30.56 50.14,27.41 MSP1.64
N$38
  Top 0.254: GPIO1.8 64.16,38.89 63.04,37.77 60.81,37.77 54.41,31.37 54.41,30.25 50.86,26.7 MSP1.62
N$39
  Top 0.305: U4.3 35.43,3.78 35.28,3.48 33.66,2.62 SV2.2
N$40
  Top 0.305: SV2.3 35.99,1.75 U4.4
N$41
  Top 0.305: SV2.4 38.43,2.87 36.55,3.99 36.45,4.09 U4.5
N$42
  Top 0.254: U$1.6 14.26,9.29 C4.1
N$43
  Top 0.254: GPIO1.7 53.8,32.23 53.8,30.33 MSP1.63
N$44
  Top 0.254: RED.C 13.53,1.25 R6.2
N$45
  Top 0.305: U5.2 45.06,3.96 42.88,3.71 41.05,2.79 SV3.1
N$46
  Top 0.305: U5.3 45.57,3.76 45.42,3.56 43.94,2.84 SV3.2
N$47
  Top 0.305: U5.4 SV3.3
N$48
  Top 0.305: U5.5 46.58,4.17 48.67,2.79 SV3.4
N$49
  Top 0.305: U3.2 24.74,3.99 23.55,3.94 | 23.55,3.94 22.3,3.68 SV1.1 | 23.55,3.94 20.62,3.28 22.25,3.68 20.22,2.46 21.84,3.28 21.03,2.46
N$50
  Top 0.305: U3.3 25.25,3.84 25.15,3.63 24.79,3.43 | 24.79,3.43 23.47,2.46 23.47,2.87 | 23.47,2.87 23.47,3.28 24.79,3.43 | 24.79,3.43 23.47,2.87 | 23.47,2.87 SV1.2
N$51
  Top 0.305: U3.4 25.76,4.09 | 25.76,4.09 25.76,2.87 25.5,2.87 25.7,3.48 | 25.7,3.48 25.91,3.68 | 25.91,3.68 25.76,4.09 | 25.76,4.09 26.31,2.87 25.91,2.87 25.91,3.68 | 25.76,4.09 25.7,3.48 | 25.7,3.48 SV1.3
N$52
  Top 0.305: U3.5 26.26,4.19 27.74,3.07 26.37,4.09 27.89,3.3 27.43,3.43 SV1.4
N$53
  Top 0.305: U7.2 55.25,4.01 53.26,3.73 51.69,3.05 SV4.1
N$54
  Top 0.305: U7.3 55.75,3.76 55.04,3.2 SV4.2
N$55
  Top 0.305: U7.4 SV4.3
N$56
  Top 0.305: U7.5 56.77,4.17 58.95,2.74 SV4.4
N$57
  Top 0.305: 23.01,3.84 20.42,2.51 20.22,2.87
N$59
  Top 0.305: 35.43,4.6 35.43,3.73 35.33,3.53 34.98,3.33 | 34.98,3.33 33.66,2.36 33.66,2.77 | 33.66,2.77 33.66,3.17 34.98,3.33 | 34.98,3.33 33.66,2.77 | 33.66,2.77 33.48,1.83
N$60
  Top 0.305: 35.94,4.6 35.94,3.99 | 35.94,3.99 35.94,2.77 35.69,2.77 35.89,3.38 | 35.89,3.38 36.09,3.58 | 36.09,3.58 35.94,3.99 | 35.94,3.99 36.5,2.77 36.09,2.77 36.09,3.58 | 35.94,3.99 35.89,3.38 | 35.89,3.38 36.02,1.83
N$61
  Top 0.305: 36.45,4.6 36.45,4.09 37.92,2.97 36.55,3.99 38.53,3.17 37.62,3.33 38.56,1.83
N$63
  Top 0.305: 45.06,4.67 45.06,3.96 43.89,3.86 | 43.89,3.86 42.62,3.66 41.07,1.9 | 43.89,3.86 40.94,3.25 42.57,3.66 40.54,2.44 42.16,3.25 41.35,2.44
N$64
  Top 0.305: 45.57,4.67 45.57,3.81 45.47,3.61 45.11,3.4 | 45.11,3.4 43.79,2.44 43.79,2.84 | 43.79,2.84 43.79,3.25 45.11,3.4 | 45.11,3.4 43.79,2.84 | 43.79,2.84 43.61,1.9
N$65
  Top 0.305: 46.08,4.67 46.08,4.06 | 46.08,4.06 46.08,2.84 45.82,2.84 46.02,3.45 | 46.02,3.45 46.23,3.66 | 46.23,3.66 46.08,4.06 | 46.08,4.06 46.63,2.84 46.23,2.84 46.23,3.66 | 46.08,4.06 46.02,3.45 | 46.02,3.45 46.15,1.9
N$66
  Top 0.305: 46.58,4.67 46.58,4.17 48.06,3.05 46.69,4.06 48.67,3.25 47.75,3.4 48.69,1.9
N$67
  Top 0.305: 43.33,3.81 40.74,2.49 40.54,2.84
N$68
  Top 0.305: 55.25,4.62 55.25,3.96 54.08,3.86 | 54.08,3.86 52.81,3.66 51.26,1.9 | 54.08,3.86 51.13,3.25 52.76,3.66 50.72,2.44 52.35,3.25 51.54,2.44
N$69
  Top 0.305: 55.75,4.67 55.75,3.81 55.65,3.61 55.3,3.4 | 55.3,3.4 53.98,2.44 53.98,2.84 | 53.98,2.84 53.98,3.25 55.3,3.4 | 55.3,3.4 53.98,2.84 | 53.98,2.84 53.8,1.9
N$70
  Top 0.305: 56.26,4.67 56.26,4.06 | 56.26,4.06 56.26,2.84 56.01,2.84 56.21,3.45 | 56.21,3.45 56.41,3.66 | 56.41,3.66 56.26,4.06 | 56.26,4.06 56.82,2.84 56.41,2.84 56.41,3.66 | 56.26,4.06 56.21,3.45 | 56.21,3.45 56.34,1.9
N$71
  Top 0.305: 56.77,4.67 56.77,4.17 58.24,3.05 56.87,4.06 58.85,3.25 57.94,3.4 58.88,1.9
N$72
  Top 0.305: 53.26,3.73 50.93,2.49 50.72,2.84
N$75  (via drill 0.3)
  Top 0.254: MSP1.83 43.47,26.8 v43.64,26.8
  Bottom 0.254: v43.64,26.8 41.91,25.07 37.03,27 33.38,23.34 32.6,23.34 JP1.4
N$76
  Top 0.254: MSP1.94 36.66,25.85 JP1.6
N$77
  Top 0.254: MSP1.95 36.52,25.27 36.02,25.27 35.18,24.44 JP1.5
RFGND
  Top 0.61: U$4.RFGND 4.67,37.31 9.75,37.31 U$4.RFGND2
  Bottom 0.61: SJ2.2 3.14,39.92 U$4.RFGND
RX
  Top 0.254: MSP1.6 38.15,19.64 38.15,20.09 36.63,21.62 32.77,21.62 29.61,21.71 JP1.2
SCL  (via drill 0.3)
  Top 0.254: COMPASS.1 62.02,3.84 v58.01,7.85 | v46.84,16.59 45.26,18.16 v40.69,18.16
  Top 0.305: RPUD.1 5.61,25.09 | 5.61,25.09 6.96,23.74 6.96,21.39 5.64,20.07 JP5.4 5.64,17.36 5.87,17.36 JP4.2 10.82,17.35 | v21.29,16.99 13.21,16.99 11.63,17.04 10.82,17.35 | MPU-6050.23 10.82,19.32 10.82,17.35 | IC1.4 7.2,25.41 5.61,25.09 | v25.65,16.94 30.84,15.62 v30.73,15.52 | v40.69,18.16 40.23,18.16 MSP1.11
  Bottom 0.254: v58.01,7.85 53.75,12.12 52.37,12.12 48.62,15.87 47.55,15.87 v46.84,16.59
  Bottom 0.305: v21.29,16.99 25.6,16.99 v25.65,16.94 | v30.73,15.52 38.15,15.52 v40.69,18.16
SCL1  (via drill 0.5)
  Top 0.406: JP2.4 v78.74,8.89 v78.74,23.49 78.74,30.93 U$5.SCL | U9.5 v81.28,8.89 | v81.28,23.49 81.56,22.58 U2.6
  Bottom 0.406: v81.28,8.89 v78.74,8.89 | v78.74,23.49 v81.28,23.49
SDA  (via drill 0.3)
  Top 0.254: RPUC.1 3.04,26.28 3.04,26.54 | COMPASS.16 62.19,4.59 v58.17,8.61 | v47.65,17.5 46.23,19.08 v39.78,19.08
  Top 0.305: IC1.3 7.7,24.6 v7.43,24.49 | v5.64,23.95 4.41,23.95 arc-90 RPUC.1 4.37,23.99 4.37,21.18 JP5.3 3.1,17.41 3.02,17.41 JP4.1 4.42,16.05 10.13,16.05 v10.41,16.33 10.74,16 v22.02,16 | MPU-6050.24 12.04,18.82 v12.04,18.06 | v27.38,17.25 v31.55,16.33 | v39.78,19.08 39.78,18.43 MSP1.10
  Bottom 0.254: v58.17,8.61 54.05,12.73 52.58,12.73 v47.65,17.5
  Bottom 0.305: v7.43,24.49 5.94,23.95 v5.64,23.95 | v12.04,18.06 12.04,17.73 11.68,17.42 | 11.68,17.42 v10.41,16.33 10.59,16.33 11.68,17.42 | v22.02,16 26.14,16 v27.38,17.25 | v31.55,16.33 37.03,16.33 v39.78,19.08
SDA1
  Top 0.406: 80.01,17.78 80.01,6.35 81.28,6.35 | 80.01,17.78 80.01,28.53 U$5.SDA | U9.6 82.6,6.35 81.28,6.35 | JP2.3 81.28,6.35 | U2.1 80.47,17.78 80.01,17.78
SPI_EXTSLAVE_TE
  Top 0.254: MSP1.76 39.9,35.33 27.58,35.33 25.96,36.96 22.4,36.96 21.14,35.69 JP3.2
SPI_FLASH_CS
  Top 0.254: MSP1.80 39.29,33.1 28.3,33.1 27.79,32.59 27.79,27.61 26.37,26.09 15.39,26.09 14.07,27.41 14.07,29.95 14.17,30.05 | 14.17,30.05 15.39,31.27 16.2,31.27 U$3.CE | R16.1 13.06,31.16 14.17,30.05
SPI_MISO
  Top 0.254: MSP1.79 39.4,33.71 28.09,33.71 27.28,32.89 27.28,27.81 26.06,26.59 22.5,26.59 19.15,29.95 | 19.15,29.95 U$3.SO | JP3.4 16.06,33.55 18.24,31.37 18.24,30.76 19.15,29.95
SPI_MOSI
  Top 0.254: MSP1.78 39.51,34.32 27.99,34.32 26.77,33.1 26.77,28.52 25.65,27.41 U$3.SI 22.81,27.41 19.05,31.17 19.05,34.21 JP3.3
SPI_SCK
  Top 0.254: MSP1.77 39.72,34.82 27.69,34.82 26.16,33.3 26.16,29.03 25.81,28.68 U$3.SCK 24.29,28.73 22.61,28.73 22.61,33.58 JP3.1
TX  (via drill 0.3)
  Top 0.254: MSP1.7 36.88,17.65 36.53,17.55 33.78,20.19 33.48,20.5 | 33.48,20.5 33.38,20.6 JP1.3 | 33.48,20.5 33.38,20.6 v31.14,20.6 | v44.35,32.08 43.54,32.89 40.39,36.14 38.93,37.26 U$4.TXD
  Bottom 0.254: v31.14,20.6 31.75,20.6 37.13,25.98 41.81,24.26 42.21,24.26 44.35,26.39 44.35,27.2 42.82,28.73 42.82,30.56 v44.35,32.08
UV_EN
  Top 0.406: JP2.5 76.2,28.57 77.05,29.42 R1.1 77.05,34.29 88.27,34.29 88.27,29.61 U1.4
V_MOTOR  (via drill 0.3)
  Top 0.254: U7.1 54.76,4.81 52.48,4.81 v52.48,4.8 51.59,4.8 51.59,4.38 C8.2 | C28.2 22.74,6.38 | v32.44,4.48 32.33,4.38 C27.2 | v43.52,4.81 arc-90 43.51,4.8 41.58,4.8 41.58,4.38 C26.2
  Top 0.305: U4.1 34.44,4.79 v32.44,4.48 | U5.1 44.58,4.81 v43.52,4.81 | C28.2 22.71,6.31 22.71,4.83 v22.83,4.7 U3.1
  Bottom 0.254: v52.48,4.8 51.59,4.8 51.59,4.19 49.87,4.19 49.87,4.18
  Bottom 0.305: 22.63,4.74 23.03,4.15 | v32.44,4.48 33.27,4.15 | v43.52,4.81 43.52,4.18 | SJ1.2 22.83,6.25 v22.83,4.7
  Bottom 0.61: SJ1.2 22.71,4.15 23.03,4.15 33.27,4.15 33.59,4.15 43.52,4.18 49.87,4.18

## Text on the board
tValues: MISO MOSI TE CLK | ML8511 | Octanis 1 v0.4 | MCP3425 | octanis.org | SCL | GND | HMC5883L | Octanis 1 weather monitor v1 | www.octanis.org | 3V3 GND SDA SCL UVEN | 5V |GND| 3.3V | GND | SDA | 3.3V
bValues: 3V3 V_mot 5V